# Altium PCB ESP32_NHAN.PcbDoc
Units mm, origin at the board's own origin, x right, y up, seen from the top; angles counter-clockwise.
Board outline 51.43 x 64.26 mm, 2 copper layers (Top Layer, Bottom Layer); 29 components, 56 nets, 158 pads, 83 vias.
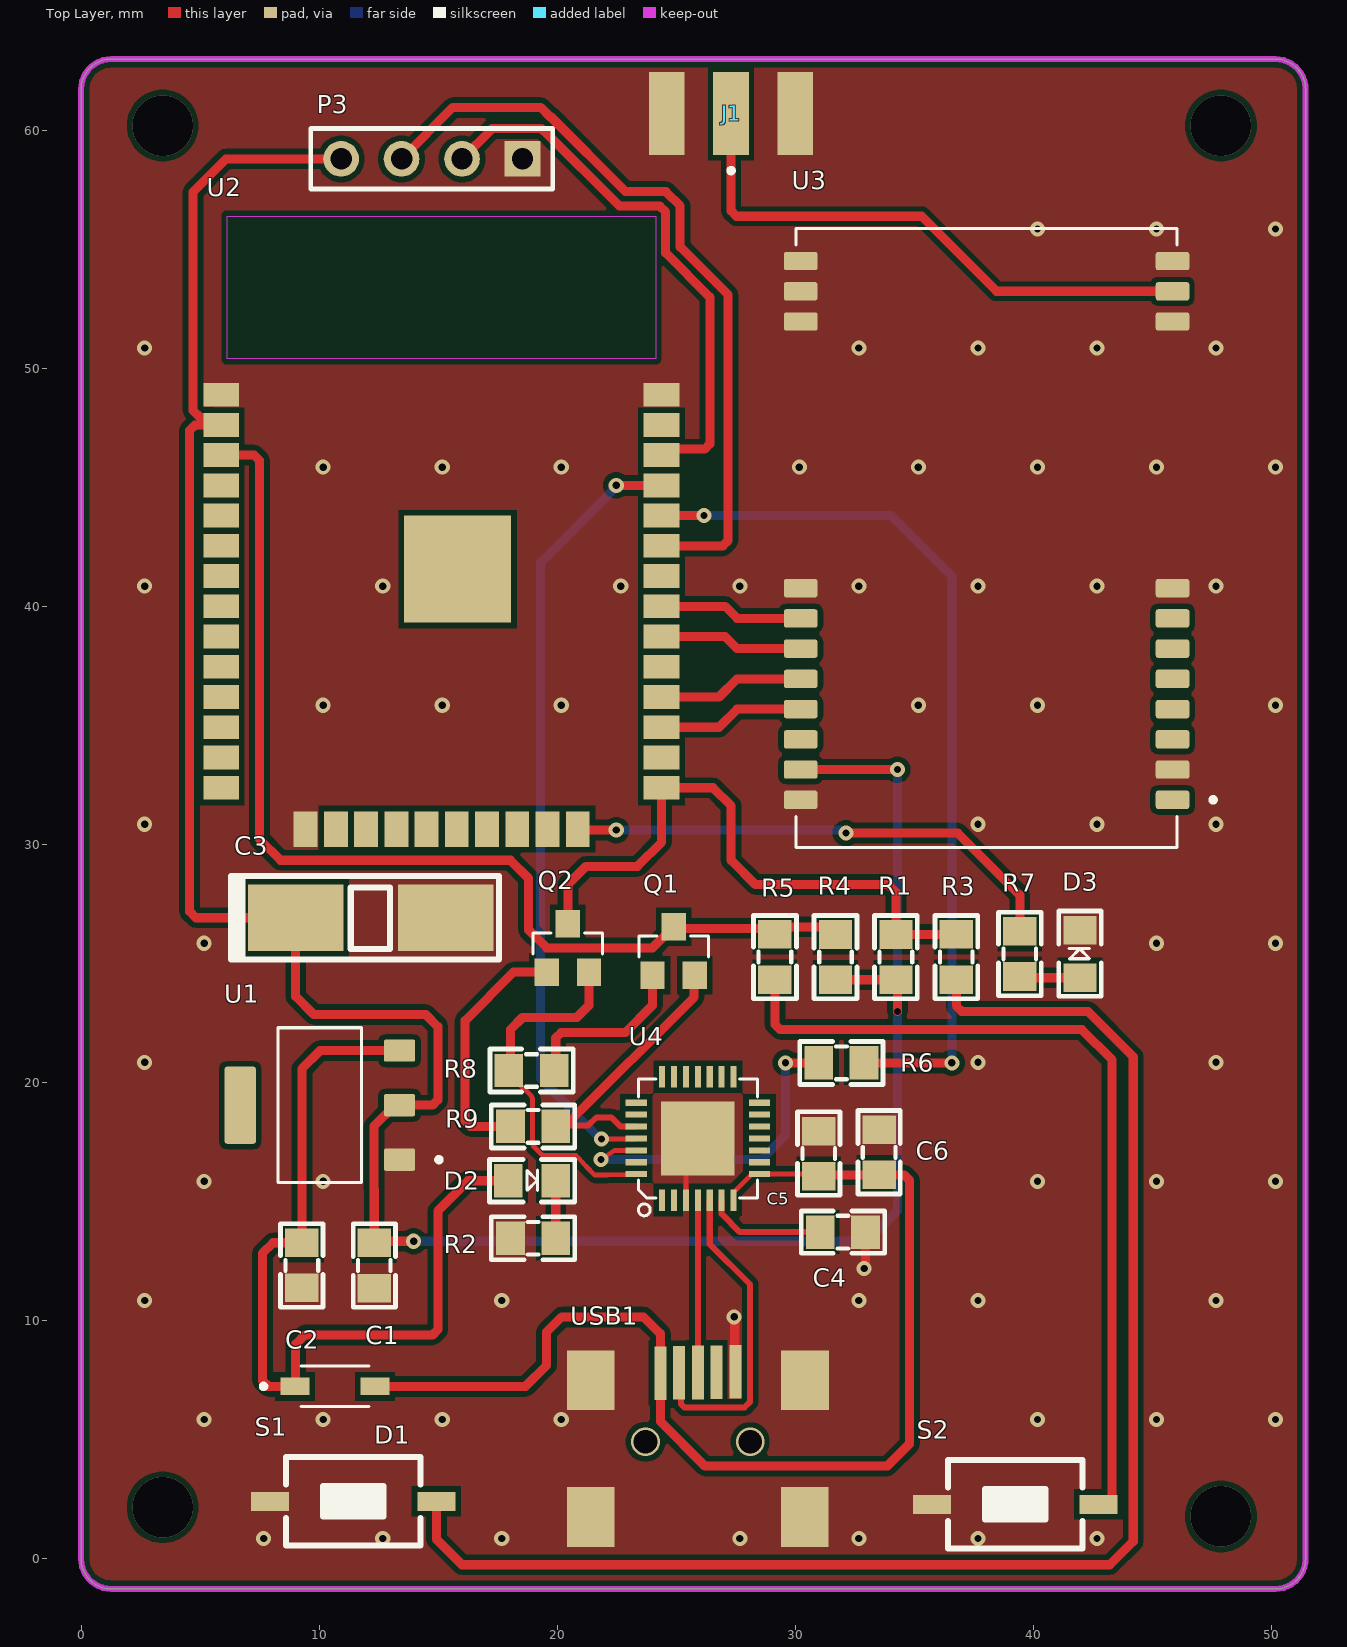
[diagram p0: Top Layer view]
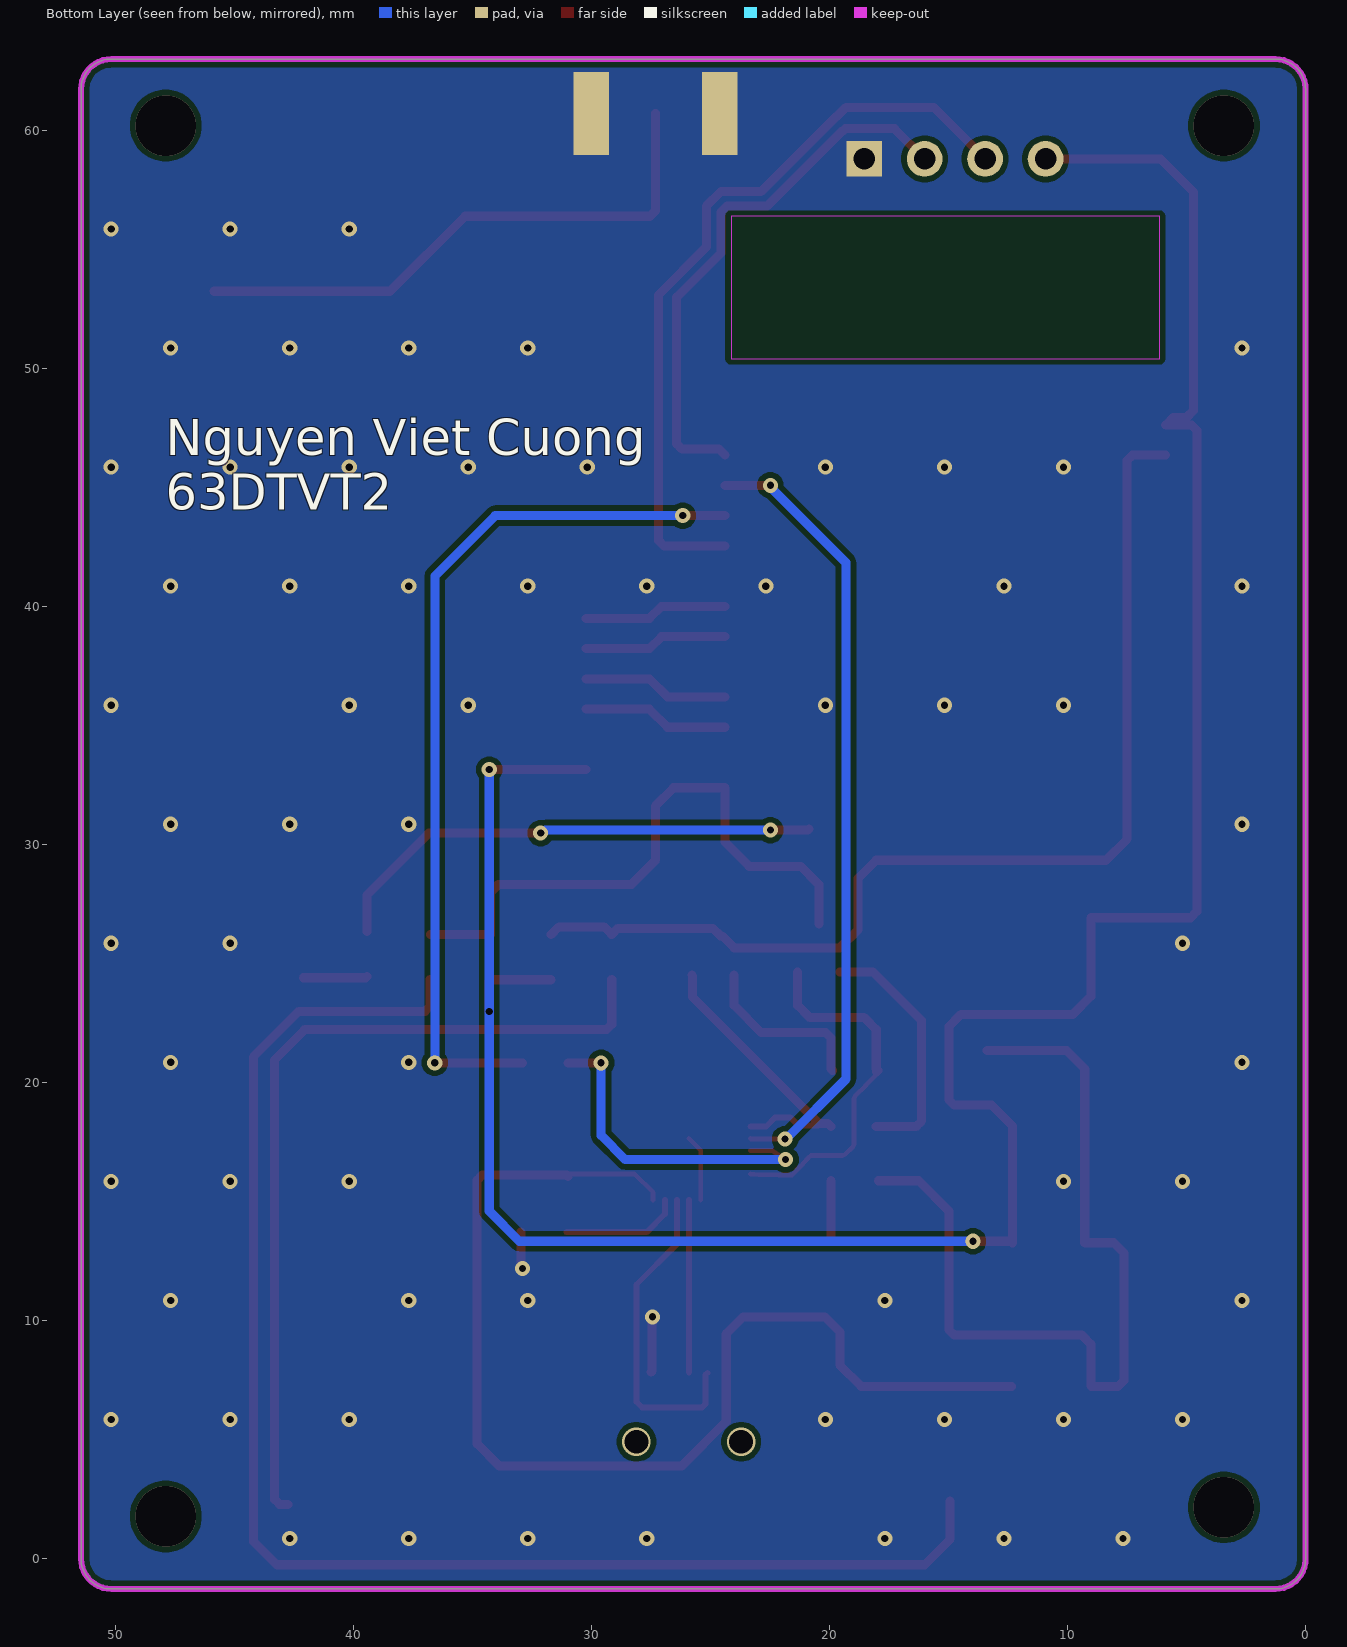
[diagram p1: Bottom Layer view, seen from below]
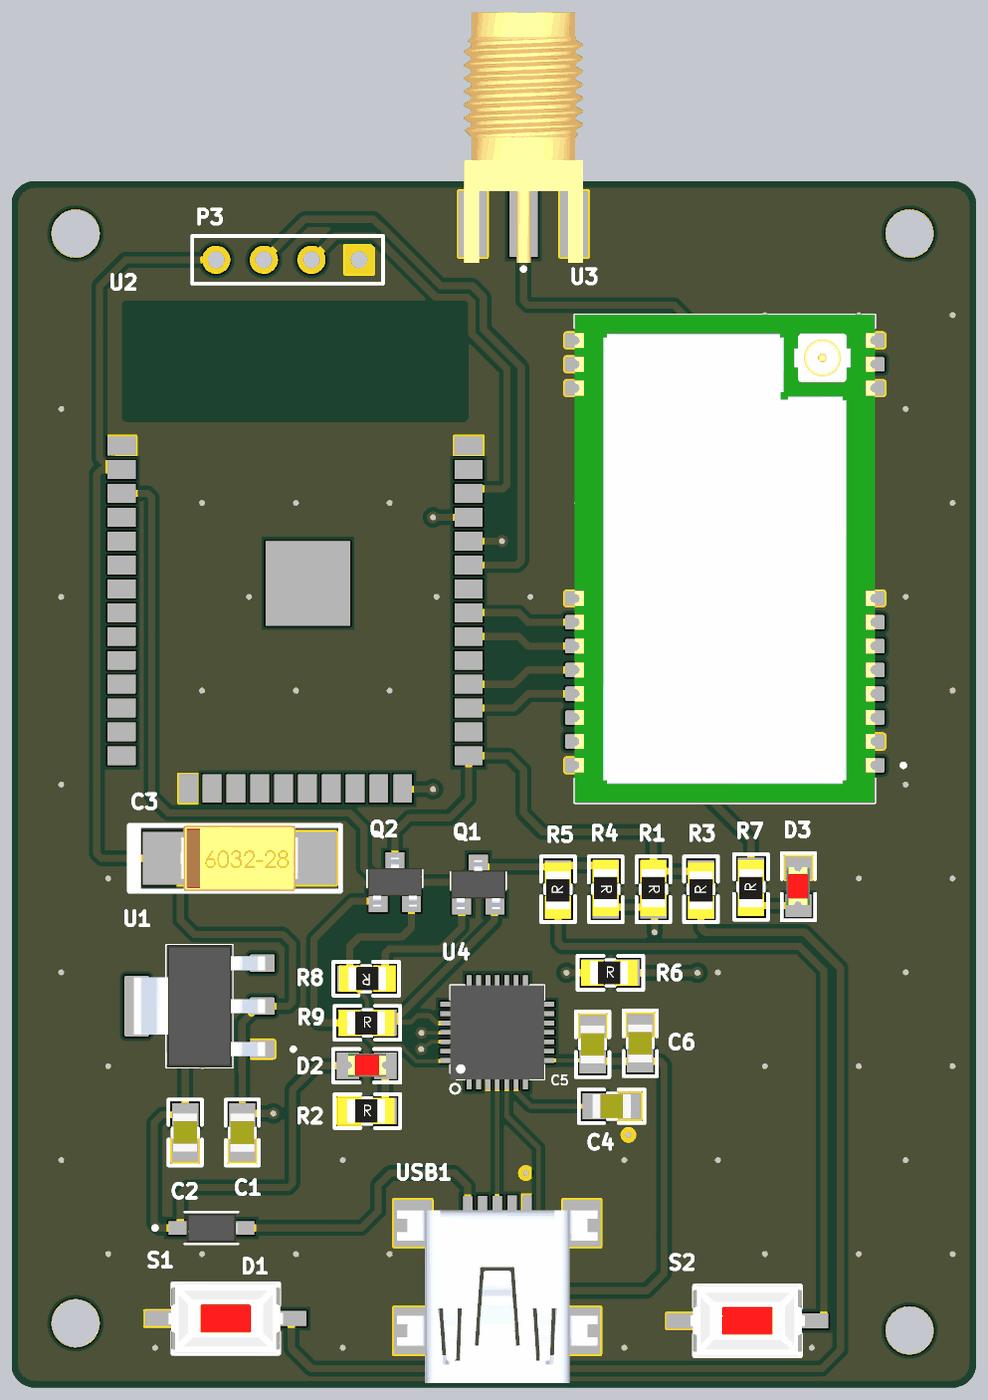
[diagram p2: 3D render of the assembled board from above, using the file's embedded part models]

## Layer stack, top to bottom
Top Solder: solder mask 0.0102, Solder Resist, Dk 3.5
Top Layer: signal copper 0.0356
Dielectric 1: dielectric 0.32, FR-4, Dk 4.8
Bottom Layer: signal copper 0.0356
Bottom Solder: solder mask 0.0102, Solder Resist, Dk 3.5

## Board outline
0,0 ccw(c1.27,0) 1.27,-1.27 50.165,-1.27 ccw(c50.165,0) 51.435,0 51.435,61.722 ccw(c50.165,61.722) 50.165,62.992 1.27,62.992 ccw(c1.27,61.722) 0,61.722

## Design rules (kind name [scope] priority, off if disabled: settings)
Clearance [All] p1: gap=0.229 ignorepadtopadclearanceinfootprint=FALSE
PlaneConnect [All] p1: planeconnectstyle=Direct reliefexpansion=0.508 reliefentries=4 reliefconductorwidth=0.254 reliefairgap=0.254
PolygonConnect [All] p1: connectstyle=Direct reliefconductorwidth=0.254 reliefentries=4 polygonreliefangle="90 Angle" airgapwidth=0.254
RoutingVias [All] p1: holewidth=0.305 width=0.635 viastyle="Through Hole" minholewidth=0.178 minwidth=0.305 maxholewidth=0.711 maxwidth=1.27
SolderMaskExpansion [All] p1: expansion=0.102 istentingtop=FALSE
Width [All] p1: maxlimit=0.381 minlimit=0.203 preferedwidth=0.254 minimp=50.000000 maximp=50.000000 favimp=50.000000
29 further rules are at their usual default settings.

## Components (designator, comment, footprint, x,y, rotation, side; value= is the part's Value field where it differs from the comment)
C1 "Cap" "Tu 0805" 12.319,12.319 r270 top value=10uF
C2 "Cap" "Tu 0805" 9.271,12.319 r90 top value=10uF
C3 "100uF" "tu tantalum smd6032" 12.167,26.924 r0 top
C4 "Cap Semi" "Tu 0805" 32.004,13.716 r180 top value=1uF
C5 "Cap Semi" "Tu 0805" 30.988,17.018 r270 top value=10uF
C6 "Cap Semi" "Tu 0805" 33.525,17.075 r270 top value=100nF
D1 "1N5819HW-7-F" SOD3715X145N 10.668,7.239 r0 top
D2 "LED2" "led 0805" 18.935,15.926 r0 top
D3 "LED3" "led 0805" 41.91,25.4 r90 top
J1 "CON-SMA-EDGE-S" RFSOLUTIONS_CON-SMA-EDGE-S 27.305,60.706 r270 top
P3 "Header 4" HDR1X4 18.542,58.801 r180 top
Q1 "SMD-TRANSISTORS-NPN-25V-500MW(SOT-23)" SOT-23 24.892,25.527 r0 top
Q2 "SMD-TRANSISTORS-NPN-25V-500MW(SOT-23)" SOT-23 20.447,25.654 r0 top
R1 "Res1" "Tro SMD 0805" 34.29,25.273 r270 top value=12K
R2 "Res1" "Tro SMD 0805" 18.985,13.523 r0 top value=1K
R3 "Res1" "Tro SMD 0805" 36.703,25.273 r90 top value=470
R4 "Res1" "Tro SMD 0805" 31.75,25.273 r270 top value=12K
R5 "Res1" "Tro SMD 0805" 29.083,25.273 r90 top value=470
R6 "Res1" "Tro SMD 0805" 31.934,20.889 r0 top value=470
R7 "Res1" "Tro SMD 0805" 39.37,25.4 r90 top value=470
R8 "Res1" "Tro SMD 0805" 18.923,20.447 r180 top value=12k
R9 "Res1" "Tro SMD 0805" 18.985,18.222 r0 top value=12k
S1 "SW-PB" SW-SMD 11.43,2.413 r180 top
S2 "SW-PB" SW-SMD 39.243,2.286 r180 top
U1 "AMS1117-3.3" SOT229P700X180-4N 10.033,19.05 r180 top
U2 "ESP-32S" ESP-32S 15.134,41.895 r0 top
U3 "E32-433T20S" MODULE_E32-433T20S 38.036,42.877 r180 top
U4 "INTERFACE-CP2102-GMR(QFN28)" QFN28G_0.5-5X5MM 25.908,17.653 r90 top
USB1 "MiniUSB 5P SMD" USB-B-Mini 25.908,7.493 r180 top

## Footprints (in the part's own frame and the unit in brackets; to place one, negate y for a bottom-side part, rotate by r counter-clockwise, add the part's x,y. Pads: shape width x height; smd on the part's side, far side on the other; paste and mask are expansions set on the pad)
ESP-32S [mm]
  rect 1.5x1 smd: 1(-9.25,7) 2(-9.25,5.73) 3(-9.25,4.46) 4(-9.25,3.19) 5(-9.25,1.92) 6(-9.25,0.65) 7(-9.25,-0.62) 8(-9.25,-1.89) 9(-9.25,-3.16) 10(-9.25,-4.43) 11(-9.25,-5.7) 12(-9.25,-6.97) 13(-9.25,-8.24) 14(-9.25,-9.51) 25(9.25,-9.51) 26(9.25,-8.24) 27(9.25,-6.97) 28(9.25,-5.7) 29(9.25,-4.43) 30(9.25,-3.16) 31(9.25,-1.89) 32(9.25,-0.62) 33(9.25,0.65) 34(9.25,1.92) 35(9.25,3.19) 36(9.25,4.46) 37(9.25,5.73) 38(9.25,7)
  rect 1x1.5 smd: 15(-5.7,-11.25) 16(-4.43,-11.25) 17(-3.16,-11.25) 18(-1.89,-11.25) 19(-0.62,-11.25) 20(0.65,-11.25) 21(1.92,-11.25) 22(3.19,-11.25) 23(4.46,-11.25) 24(5.73,-11.25)
  rect 4.5x4.5 smd: GND(0.68,-0.33)
  Keep-Out Layer region: 9,8.5 -9,8.5 -9,14.5 9,14.5
  Keep-Out Layer region: 9,8.5 -9,8.5 -9,14.5 9,14.5
HDR1X4 [mm] "Connector; Header; 4 Position"
  rect 1.5x1.5 hole 0.9: 1(0,0)
  round 1.5 hole 0.9: 2(2.54,0) 3(5.08,0) 4(7.62,0)
  silkscreen extent -1.27,-1.27 8.89,1.27
"led 0805" [mm]
  rect 1.2x1.4 smd: 1(-0.996,-0.051) 2(1.004,-0.051)
  silkscreen extent -1.78,-0.94 1.8,0.84, body extent -0.98,-0.65 1.04,0.6, height 1.1
MODULE_E32-433T20S [mm]
  rrect25% 1.41x0.77 smd: 1(-7.81,11) 2(-7.81,9.73) 3(-7.81,8.46) 4(-7.81,7.19) 5(-7.81,5.92) 6(-7.81,4.65) 7(-7.81,3.38) 8(-7.81,2.11) 11(-7.81,-9.09) 12(-7.81,-10.36) 13(-7.81,-11.63) 14(7.81,-11.63) 15(7.81,-10.36) 16(7.81,-9.09) 19(7.81,2.11) 20(7.81,3.38) 21(7.81,4.65) 22(7.81,5.92) 23(7.81,7.19) 24(7.81,8.46) 25(7.81,9.73) 26(7.81,11)
  silkscreen extent -9.61,-13 8,13, body extent -8,-13 8,13, height 3.25
QFN28G_0.5-5X5MM [mm]
  rect 0.9x0.254 smd: 1(-2.59,1.5) 2(-2.59,1) 3(-2.59,0.5) 4(-2.59,0) 5(-2.59,-0.5) 6(-2.59,-1) 7(-2.59,-1.5) 15(2.59,-1.5) 16(2.59,-1) 17(2.59,-0.5) 18(2.59,0) 19(2.59,0.5) 20(2.59,1) 21(2.59,1.5)
  rect 0.254x0.9 smd: 8(-1.5,-2.59) 9(-1,-2.59) 10(-0.5,-2.59) 11(0,-2.59) 12(0.5,-2.59) 13(1,-2.59) 14(1.5,-2.59) 22(1.5,2.59) 23(1,2.59) 24(0.5,2.59) 25(0,2.59) 26(-0.5,2.59) 27(-1,2.59) 28(-1.5,2.59)
  rect 3.1x3.1 smd paste-3: 29(0,0)
  silkscreen extent -3.25,-2.5 2.5,2.5, body extent -2.5,-2.5 2.5,2.5, height 1
RFSOLUTIONS_CON-SMA-EDGE-S [mm]
  rect 3.5x1.5 smd: 1(0,0) G1(0,2.7) G2(0,-2.7)
  rect 3.5x1.5 smd far side: G3(0,2.7) G4(0,-2.7)
  silkscreen extent 2.3,-0.1 2.5,0.1, body extent -11.27,-3.18 2.06,3.18, height 3.55
SOD3715X145N [mm]
  rect 1.21x0.73 smd: A(1.68,0) C(-1.68,0)
  silkscreen extent -3.1,-0.85 1.42,0.85, body extent -1.83,-0.77 1.83,0.77, height 0.8
SOT229P700X180-4N [mm]
  rrect15% 1.31x0.93 smd: 1(-3.345,2.29) 2(-3.345,0) 3(-3.345,-2.29)
  rrect15% 1.31x3.24 smd: 4(3.345,0)
  silkscreen extent -5.1,-3.25 1.75,3.25, body extent -3.5,-3.25 3.5,3.25, height 1.8
SOT-23 [mil]
  rect 40x45 smd: 1(-35,-40) 2(35,-40) 3(0,40)
  silkscreen extent -58,-10 58,25, body extent -57,-51 57,51, height 55
SW-SMD [mm] "Switch SMD type"
  rect 1.6x0.8 smd: 1(-3.5,0) 2(3.5,0)
  silkscreen extent -2.82,-1.85 2.82,1.85, body extent -3.05,-1.85 3.05,1.85, height 2.5
"Tro SMD 0805" [mm]
  rect 1.2x1.4 smd: 1(-0.946,-0.061) 2(0.954,-0.061)
  silkscreen extent -1.75,-0.97 1.75,0.84, body extent -1.56,-0.76 1.44,0.64, height 0.53
"Tu 0805" [mm] "Compoment SMD 80x50mil"
  rect 1.2x1.4 smd: 1(-0.946,-0.003) 2(0.954,-0.003)
  silkscreen extent -1.75,-0.89 1.75,0.89, body extent -1.01,-0.64 1.01,0.63, height 0.61
"tu tantalum smd6032" [mm]
  rect 4x2.8 smd: 1(-3.15,0) 2(3.15,0)
  silkscreen extent -5.87,-1.75 5.38,1.75, body extent -3.15,-1.75 3.15,1.75, height 2.79
USB-B-Mini [mm]
  rect 0.5x2.25 smd: 1(1.575,-0.305) 2(0.787,-0.317) 3(0,-0.33) 4(-0.787,-0.343) 5(-1.575,-0.356)
  rect 2x2.5 smd: 5(-4.5,0) 5(-4.496,5.74) 5(4.5,0) 5(4.504,5.74)
  body extent -5.35,-0.67 5.35,8.53, height 3.95

## Part data
C1 C2: "Capacitor", LatestRevisionDate=17-Jul-2002, LatestRevisionNote="Re-released for DXP Platform.", PackageDescription="Radial Cap, Thru-Hole; 2 Leads; 0.3 in Pin Spacing", PackageReference=RAD-0.3, Published=8-Jun-2000, Publisher="Altium Limited"
C3: library part "Tu tantalum 100uF 10V SMD6032", "Dán", Chung_Loai=Dán, Don_Vi=Con, Ma_Hang=MH007594, So_Chan=2, Ten_Linh_Kien="Tụ tantalum 107A-100uF 10V SMD6032"
C4 C5 C6: "Capacitor (Semiconductor SIM Model)", LatestRevisionDate=29-May-2009, LatestRevisionNote="IPC-7351 Footprint Added.", PackageDescription="Chip Capacitor", PackageReference=C1206, Published=8-Jun-2000, Publisher="Altium Limited"
D1: "Diode Schottky 40 V 1A Surface Mount SOD-123", Package="SOD-123 Fairchild Semiconductor", Availability="In Stock", Check_prices=https://www.snapeda.com/parts/1N5819HW-7-F/Diodes+Inc./view-part/?ref=eda, MF="Diodes Inc.", MP=1N5819HW-7-F, Price=None, Purchase-URL=https://pricing.snapeda.com/search/part/1N5819HW-7-F/?ref=eda, SnapEDA_Link=https://www.snapeda.com/parts/1N5819HW-7-F/Diodes+Inc./view-part/?ref=snap
D2: "Typical RED, GREEN, YELLOW, AMBER GaAs LED", LatestRevisionDate=17-Jul-2002, LatestRevisionNote="Re-released for DXP Platform.", PackageDescription="SM LED; 2 Flat Leads", PackageReference=3.2X1.6X1.1, PackageVersion=Feb-2002, Published=8-Jun-2000, Publisher="Altium Limited"
D3: "Typical BLUE SiC LED", DatasheetVersion=16-Apr-2002, LatestRevisionDate=17-Dec-2003, LatestRevisionNote="PCB Footprint replaced.", PackageDescription="SM LED; 2 C-Bend Leads; Body 3.5 x 2.8 x 1.9 mm, inc leads (LxWxH typ)", PackageReference=3.5X2.8X1.9, PackageVersion=16-Apr-2002, Published=8-Jun-2000, Publisher="Altium Limited"
J1: "SMA Connector Jack, Female Socket - Board Edge, End Launch Solder", Package=None, Check_prices=https://www.snapeda.com/parts/CON-SMA-EDGE-S/RF+Solutions/view-part/?ref=eda, Digi-Key_Part_Number=CON-SMA-EDGE-S-ND, MF="RF Solutions", MP=CON-SMA-EDGE-S, Purchase-URL=https://pricing.snapeda.com/search/part/CON-SMA-EDGE-S/?ref=eda, SnapEDA_Link=https://www.snapeda.com/parts/CON-SMA-EDGE-S/RF+Solutions/view-part/?ref=snap
P3: "Header, 4-Pin", LatestRevisionDate=17-Jul-2002, LatestRevisionNote="Re-released for DXP Platform.", Publisher="Altium Limited"
Q1 Q2: "Bipolar (BJT) Transistor NPN 25 V 500 mA 150MHz 300 mW Surface Mount SOT-23", Package=None, Availability="In Stock", Check_prices=https://www.snapeda.com/parts/S8050/Umwelt+Sensor+Teknik/view-part/?ref=eda, MF=UMW, MP=S8050, Price=None, Purchase-URL=https://pricing.snapeda.com/search/part/S8050/?ref=eda, SnapEDA_Link=https://www.snapeda.com/parts/S8050/Umwelt+Sensor+Teknik/view-part/?ref=snap
R1 R2 R3 R4 R5 R6 R7 R8 R9: "Resistor", LatestRevisionDate=17-Jul-2002, LatestRevisionNote="Re-released for DXP Platform.", PackageDescription="Axial Device, Thru-Hole; 2 Leads; 0.3 in Pin Spacing", PackageReference=AXIAL-0.3, Published=8-Jun-2000, Publisher="Altium Limited"
S1 S2: "Switch", LatestRevisionDate=17-Jul-2002, LatestRevisionNote="Re-released for DXP Platform.", PackageDescription="Switch; 2 Leads", PackageReference=SPST-2, Published=24-Mar-1999, Publisher="Altium Limited"
U1: "Sot223/Pkg 1-Amp 3.3-Volt Low Drop Out Voltage Regulatator", Package="SOT-223 Seeed Technology", Availability="Not in stock", Check_prices=https://www.snapeda.com/parts/AMS1117-3.3/Advanced+Monolithic+Systems/view-part/?ref=eda, MF="Advanced Monolithic Systems", MP=AMS1117-3.3, Price=None, SnapEDA_Link=https://www.snapeda.com/parts/AMS1117-3.3/Advanced+Monolithic+Systems/view-part/?ref=snap
U2: "- - Transceiver Module - - Surface Mount", Package=None, Check_prices=https://www.snapeda.com/parts/ESP-32S/Olimex+LTD/view-part/?ref=eda, MF="Olimex LTD", MP=ESP-32S, SnapEDA_Link=https://www.snapeda.com/parts/ESP-32S/Olimex+LTD/view-part/?ref=snap
U3: "Wireless serial port module (UART)", Package=Package, Availability="Not in stock", Check_prices=https://www.snapeda.com/parts/E32-433T20S/EBYTE/view-part/?ref=eda, MF=EBYTE, MP=E32-433T20S, Price=None, SnapEDA_Link=https://www.snapeda.com/parts/E32-433T20S/EBYTE/view-part/?ref=snap
U4: "USB Bridge, USB to UART USB 2.0 UART Interface 28-QFN (5x5)", Package="VFQFN-28 Vishay Siliconix", Availability="In Stock", Check_prices=https://www.snapeda.com/parts/CP2102-GMR/Silicon+Labs/view-part/?ref=eda, MF=Silicon, MP=CP2102-GMR, Price=None, Purchase-URL=https://pricing.snapeda.com/search/part/CP2102-GMR/?ref=eda, SnapEDA_Link=https://www.snapeda.com/parts/CP2102-GMR/Silicon+Labs/view-part/?ref=snap
USB1: library part USB_MINI, "Dán", Chung_Loai=Dán, Don_Vi=Con, Ma_Hang=MH001022, Ten_Linh_Kien="MiniUSB 5P SMD"

## Via types
v1: diameter 0.635, hole 0.305, Top Layer to Bottom Layer, tented both sides, 74 vias
v2: diameter 2.54, hole 2.54, Top Layer to Bottom Layer, 4 vias
v3: diameter 0.635, hole 0.305, Top Layer to Bottom Layer, 2 vias
v4: diameter 1.2, hole 1, Top Layer to Bottom Layer, 2 vias
v5: diameter 0/0 (per signal layer), hole 0.305, Top Layer to Bottom Layer, tented both sides, 1 vias

## Nets (pads, with @x,y where several pads share a name; then routed paths per layer and width w, separated by ;. In a path a pad name is that pad's centre, name@x,y a point inside that pad or via, vN(x,y) a via of type N, cw(c..) or ccw(c..) an arc to the next point about the centre after c; other vN are vias at no path point)
#EN: Q1.3 R4.1 R5.2 U2.3 | length 45.7
  Top Layer w0.381: U2.3 7.27,46.355 7.493,46.132 7.493,30.226 8.382,29.337 18.034,29.337 18.796,28.575 18.796,26.416 19.558,25.654 24.003,25.654 24.511,26.162 24.575,26.162 24.892,26.479 28.892,26.479 R5.2@29.153,26.219 ; R5.2 29.459,26.543 31.365,26.543 R4.1
ACTIVE: U4.11
CLK: U2.20
CMD: U2.19
CTS: U4.23
D_N: U4.5 USB1.2 | length 13.6
  Top Layer w0.254: USB1.2 25.207,7.724 25.207,6.491 25.356,6.343 26.628,6.343 26.636,6.351 27.863,6.351 28.105,6.593 28.105,11.519 26.408,13.216 U4.5
D_P: U4.4 USB1.3 | length 7.2
  Top Layer w0.254: USB1.3 U4.4
DCD: U4.1
DSR: U4.27
DTR: Q2.2 R8.2 U4.28 | length 15.2
  Top Layer w0.203: R8.2@17.969,20.385 18.457,19.909 18.457,19.897 18.91,19.444 18.969,19.301 18.969,17.437 ccw(c19.172,17.437) 19.028,17.294 19.331,16.991 19.475,16.931 20.788,16.931 20.907,16.812 21.196,16.496 21.576,16.116 22.112,16.116 22.97,16.128 U4.28
  Top Layer w0.381: R8.2@18.029,20.447 R8.2 18.034,20.573 18.034,22.225 18.542,22.733 20.828,22.733 21.336,23.241 Q2.2
GND: C1.2 C2.1 C3.2 C4.1 C5.1 C6.1 D3.2 J1.G1 J1.G2 J1.G3 J1.G4 P3.1 R2.1 S1.2 S2.2 U1.1 U2.1 U2.15 U2.38 U3.2 U3.8 U3.11 U3.13 U3.14 U3.15 U3.16 U3.19 U3.26 U4.3 U4.29 USB1.5 | length 6.7
  Top Layer w0.203: U4.3 25.408,17.153 U4.29
  Top Layer w0.381: v3(27.432,10.16) 27.457,10.135 27.457,7.874 USB1.5@27.483,7.849 ; v3(32.893,12.192) ccw(c32.893,12.249) 32.95,12.249 C4.1
  other v1: 7.671,0.851 12.671,0.851 17.671,0.851 27.671,0.851 32.671,0.851 37.671,0.851 42.671,0.851 5.171,5.851 10.171,5.851 15.171,5.851 20.171,5.851 40.171,5.851 45.171,5.851 50.171,5.851 2.671,10.851 17.671,10.851 32.671,10.851 37.671,10.851 47.671,10.851 5.171,15.851 10.171,15.851 40.171,15.851 45.171,15.851 50.171,15.851 2.671,20.851 37.671,20.851 47.671,20.851 5.171,25.851 45.171,25.851 50.171,25.851 2.671,30.851 37.671,30.851 42.671,30.851 47.671,30.851 10.171,35.851 15.171,35.851 20.171,35.851 35.171,35.851 40.171,35.851 50.171,35.851 2.671,40.851 12.671,40.851 22.671,40.851 27.671,40.851 32.671,40.851 37.671,40.851 42.671,40.851 47.671,40.851 10.171,45.851 15.171,45.851 20.171,45.851 30.171,45.851 35.171,45.851 40.171,45.851 45.171,45.851 50.171,45.851 2.671,50.851 32.671,50.851 37.671,50.851 42.671,50.851 47.671,50.851 40.171,55.851 45.171,55.851 50.171,55.851
IO0: Q2.3 R1.1 R3.2 U2.25 | length 25.9
  Top Layer w0.381: Q2.3 20.447,28.321 21.209,29.083 23.368,29.083 24.384,30.099 U2.25 26.543,32.385 27.305,31.623 27.305,29.337 28.321,28.321 33.909,28.321 34.229,28.001 R1.1 34.238,26.227 R3.2
IO2: R7.2 U2.24 | length 21.2
  Top Layer w0.381: U2.24 20.902,30.607 v1(22.479,30.607) ; v1(32.131,30.48) 36.825,30.48 39.431,27.874 R7.2
  Bottom Layer w0.381: v1(22.479,30.607) 31.935,30.607 32.062,30.48 v1(32.131,30.48)
IO4: U2.26
IO5: U2.29
IO12: U2.14
IO13: U2.16
IO14: U2.13
IO15: U2.23
IO16: U2.27 U3.23 | length 6.2
  Top Layer w0.381: U2.27 26.797,34.925 27.559,35.687 U3.23
IO17: U2.28 U3.22 | length 6.2
  Top Layer w0.381: U2.28 26.797,36.195 27.559,36.957 U3.22
IO18: U2.30 U3.21 | length 6.1
  Top Layer w0.381: U2.30 27.051,38.735 27.559,38.227 U3.21
IO19: U2.31 U3.20 | length 6.1
  Top Layer w0.381: U2.31 27.051,40.005 27.559,39.497 U3.20
IO21: P3.3 U2.33 | length 32.1
  Top Layer w0.381: P3.3 15.621,60.96 19.304,60.96 19.684,60.58 19.718,60.58 22.874,57.424 24.56,57.424 25.163,56.821 25.163,55.101 27.178,53.086 27.178,42.768 26.955,42.545 U2.33
IO22: P3.2 U2.36 | length 23.3
  Top Layer w0.381: P3.2 17.272,60.071 19.331,60.071 19.432,59.97 19.466,59.97 22.622,56.814 24.308,56.814 24.553,56.569 24.553,54.849 26.416,52.986 26.416,46.828 26.193,46.604 24.633,46.604 U2.36
IO23: U2.37
IO25: U2.10
IO26: U2.11
IO27: U2.12
IO32: U2.8
IO33: U2.9
IO34: U2.6
IO35: U2.7
NetC4_2: C4.2 U4.6 | length 5
  Top Layer w0.254: U4.6 26.908,14.483 27.675,13.716 31.046,13.716 C4.2
NetD2_2: D2.2 R2.2 | length 2.4
  Top Layer w0.381: R2.2 D2.2
NetD3_1: D3.1 R7.1 | length 2.7
  Top Layer w0.381: R7.1 39.481,24.404 D3.1@42.088,24.404
NetJ1_1: J1.1 U3.12 | length 24
  Top Layer w0.381: J1.1 27.305,56.611 27.528,56.388 35.306,56.388 38.457,53.237 U3.12
NetQ1_1: Q1.1 R8.1 | length 7.3
  Top Layer w0.381: R8.1 19.939,20.578 19.939,21.875 20.162,22.098 22.86,22.098 24.003,23.241 Q1.1
NetQ2_1: Q2.1 R9.1 | length 10.5
  Top Layer w0.381: R9.1 16.352,18.161 16.129,18.384 16.129,22.606 18.161,24.638 Q2.1
NetR3_1: R3.1 S1.1 | length 61.5
  Top Layer w0.381: S1.1 14.93,0.818 16.002,-0.254 43.211,-0.254 44.196,0.731 44.196,21.082 42.291,22.987 36.99,22.987 36.767,23.21 36.767,24.325 R3.1
NetR5_1: R5.1 S2.1 | length 35.8
  Top Layer w0.381: R5.1 29.144,22.448 29.367,22.225 42.037,22.225 43.307,20.955 43.307,2.496 43.097,2.286 S2.1
NetR6_1: R6.1 U4.26 | length 14.2
  Top Layer w0.203: v1(21.844,16.764) 22.408,17.153 U4.26
  Top Layer w0.381: v1(29.591,20.828) R6.1
  Bottom Layer w0.381: v1(21.844,16.764) 28.575,16.764 29.591,17.78 v1(29.591,20.828)
OTG_ID: USB1.4
RI: U4.2
RTS: Q1.2 R9.2 U4.24 | length 12.3
  Top Layer w0.254: R9.2@20.485,18.199 21.308,18.199 21.65,18.542 22.275,18.542 22.664,18.153 U4.24
  Top Layer w0.381: R9.2 20.066,18.288 20.574,18.288 ; R9.2@20.447,18.288 25.75,23.591 25.75,24.48 Q1.2
SD0: U2.21
SD1: U2.22
SD2: U2.17
SD3: U2.18
SVN: U2.5
SVP: U2.4
U0RX: R6.2 U2.34 | length 37.4
  Top Layer w0.381: U2.34 v1(26.162,43.815) ; R6.2 v1(36.576,20.828)
  Bottom Layer w0.381: v1(26.162,43.815) 34.036,43.815 36.576,41.275 v1(36.576,20.828)
U0TX: U2.35 U4.25 | length 33.2
  Top Layer w0.203: v1(21.866,17.627) 22.422,17.628 23.293,17.628 U4.25
  Top Layer w0.381: v1(22.479,45.085) U2.35
  Bottom Layer w0.381: v1(21.866,17.627) 21.828,17.627 19.304,20.151 19.304,41.841 22.479,45.016 v1(22.479,45.085)
VDD3V3: C1.1 C3.1 P3.4 R1.2 R4.2 U1.2 U2.2 U3.25 | length 113.5
  Top Layer w0.381: P3.4 6.096,58.801 4.699,57.404 4.699,48.237 5.002,47.935 5.556,47.935 5.875,47.616 4.786,47.616 4.563,47.392 4.563,27.187 4.826,26.924 C3.1 9.017,23.622 9.779,22.86 14.478,22.86 14.986,22.352 14.986,19.273 14.763,19.05 U1.2 13.188,19.05 12.304,18.166 12.304,15.522 12.316,15.51 C1.1 12.386,13.335 v1(13.97,13.335) ; U3.25 v1(34.29,33.147) ; R4.2 R1.2 34.29,24.258 v5(34.29,22.987)
  Bottom Layer w0.381: v1(13.97,13.335) 33.02,13.335 34.29,14.605 v1(34.29,33.147)
VDD5V: C2.2 D1.C D2.1 U1.3 | length 36.8
  Top Layer w0.381: U1.3 10.037,21.34 9.274,20.577 C2.2 8.066,13.273 7.62,12.827 7.62,7.493 7.874,7.239 D1.C 9.017,7.268 9.017,9.017 9.398,9.398 14.763,9.398 14.986,9.621 14.986,14.605 16.256,15.875 D2.1
VDDUSB: C5.2 C6.2 D1.A U4.7 U4.8 USB1.1 | length 48.9
  Top Layer w0.203: U4.7 27.408,15.386 28.175,16.153 U4.8 30.895,16.153 C5.2
  Top Layer w0.381: D1.A 18.669,7.239 19.558,8.128 19.558,9.525 20.193,10.16 23.622,10.16 24.333,9.449 USB1.1 24.333,5.766 26.205,3.894 33.866,3.894 34.798,4.826 34.798,15.897 34.575,16.12 C6.2 31.041,16.12 C5.2
pads on no net: U1.4 U2.32 U2.GND U3.1 U3.3 U3.4 U3.5 U3.6 U3.7 U3.24 U4.9 U4.10 U4.12 U4.13 U4.14 U4.15 U4.16 U4.17 U4.18 U4.19 U4.20 U4.21 U4.22
copper on no net:
  other v2: 47.879,1.778 3.429,2.159 3.429,60.198 47.879,60.198
  other v4: 23.708,4.913 28.108,4.913

## Polygon pours and split planes (outlines as drawn)
GND on Bottom Layer "NONET_L-01_P-001" (solid, remove dead copper, pour order 0): -2.032,65.405 -1.778,65.151 55.245,65.151 55.245,-6.096 55.753,-6.604 55.372,-6.985 -4.953,-6.985 -4.953,62.484
GND on Top Layer "NONET_L-01_P-001" (solid, remove dead copper, pour order 1): -5.588,68.58 -4.953,67.945 60.325,67.945 60.325,-3.429 56.388,-7.366 -6.731,-7.366 -6.731,67.437

## Keep-outs
Keep-Out Layer:
  the board outline again, w0.254

## Silkscreen, mask and mechanical layers (free items; w line width, h text height)
Bottom Overlay:
  text "Nguyen Viet Cuong / 63DTVT2" at 47.879,44.069 h1.52